# Altium PCB PCB1.PcbDoc
Units mm, origin at the board's own origin, x right, y up, seen from the top; angles counter-clockwise.
Board outline 91.43 x 88.01 mm, 2 copper layers (Top Layer, Bottom Layer); 43 components, 45 nets, 208 pads, 92 vias.
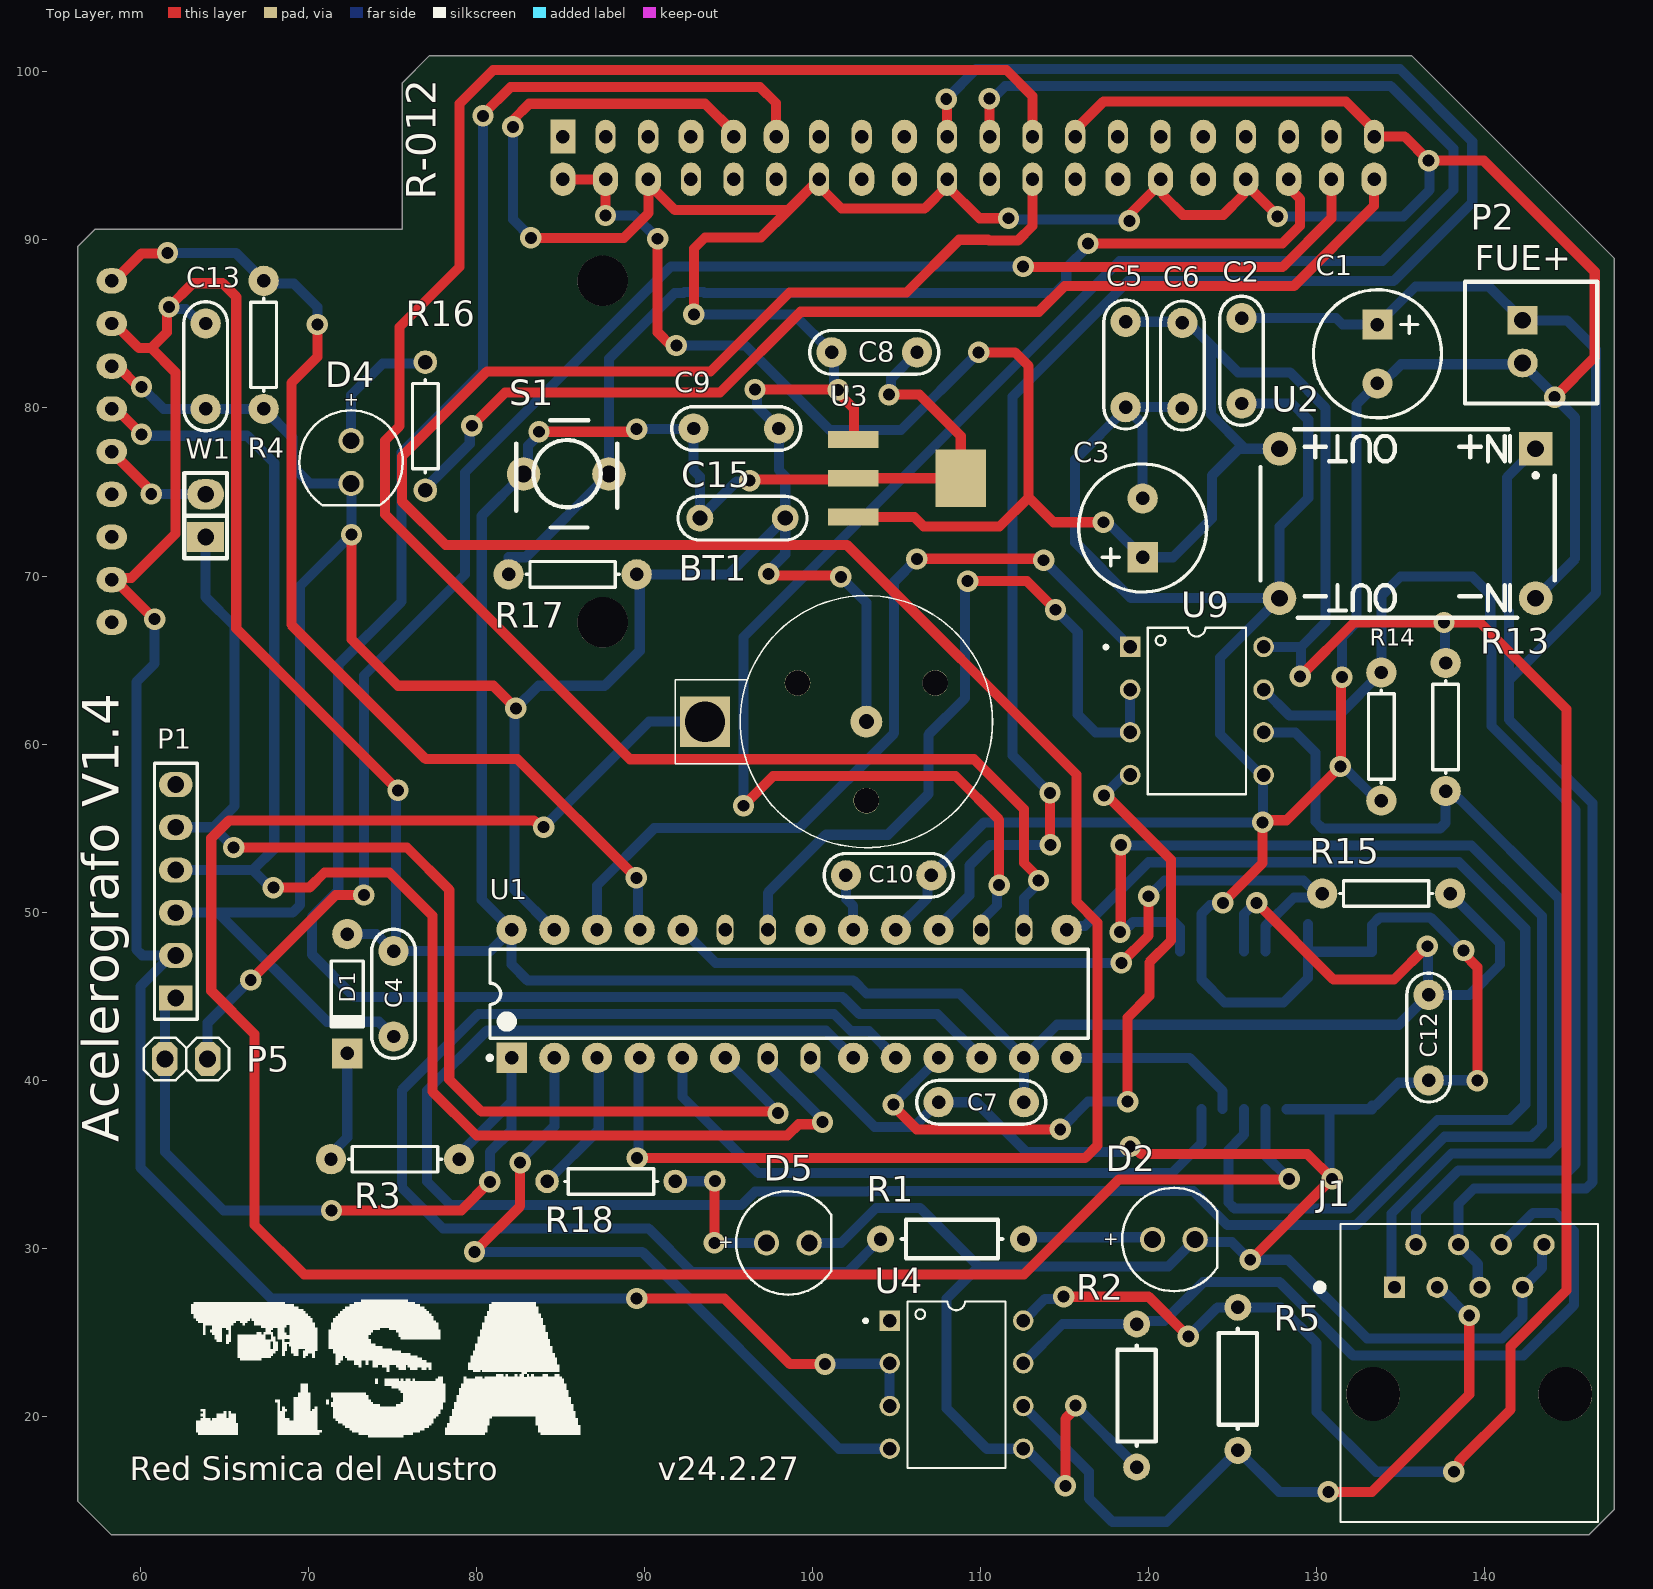
[diagram p0: Top Layer view]
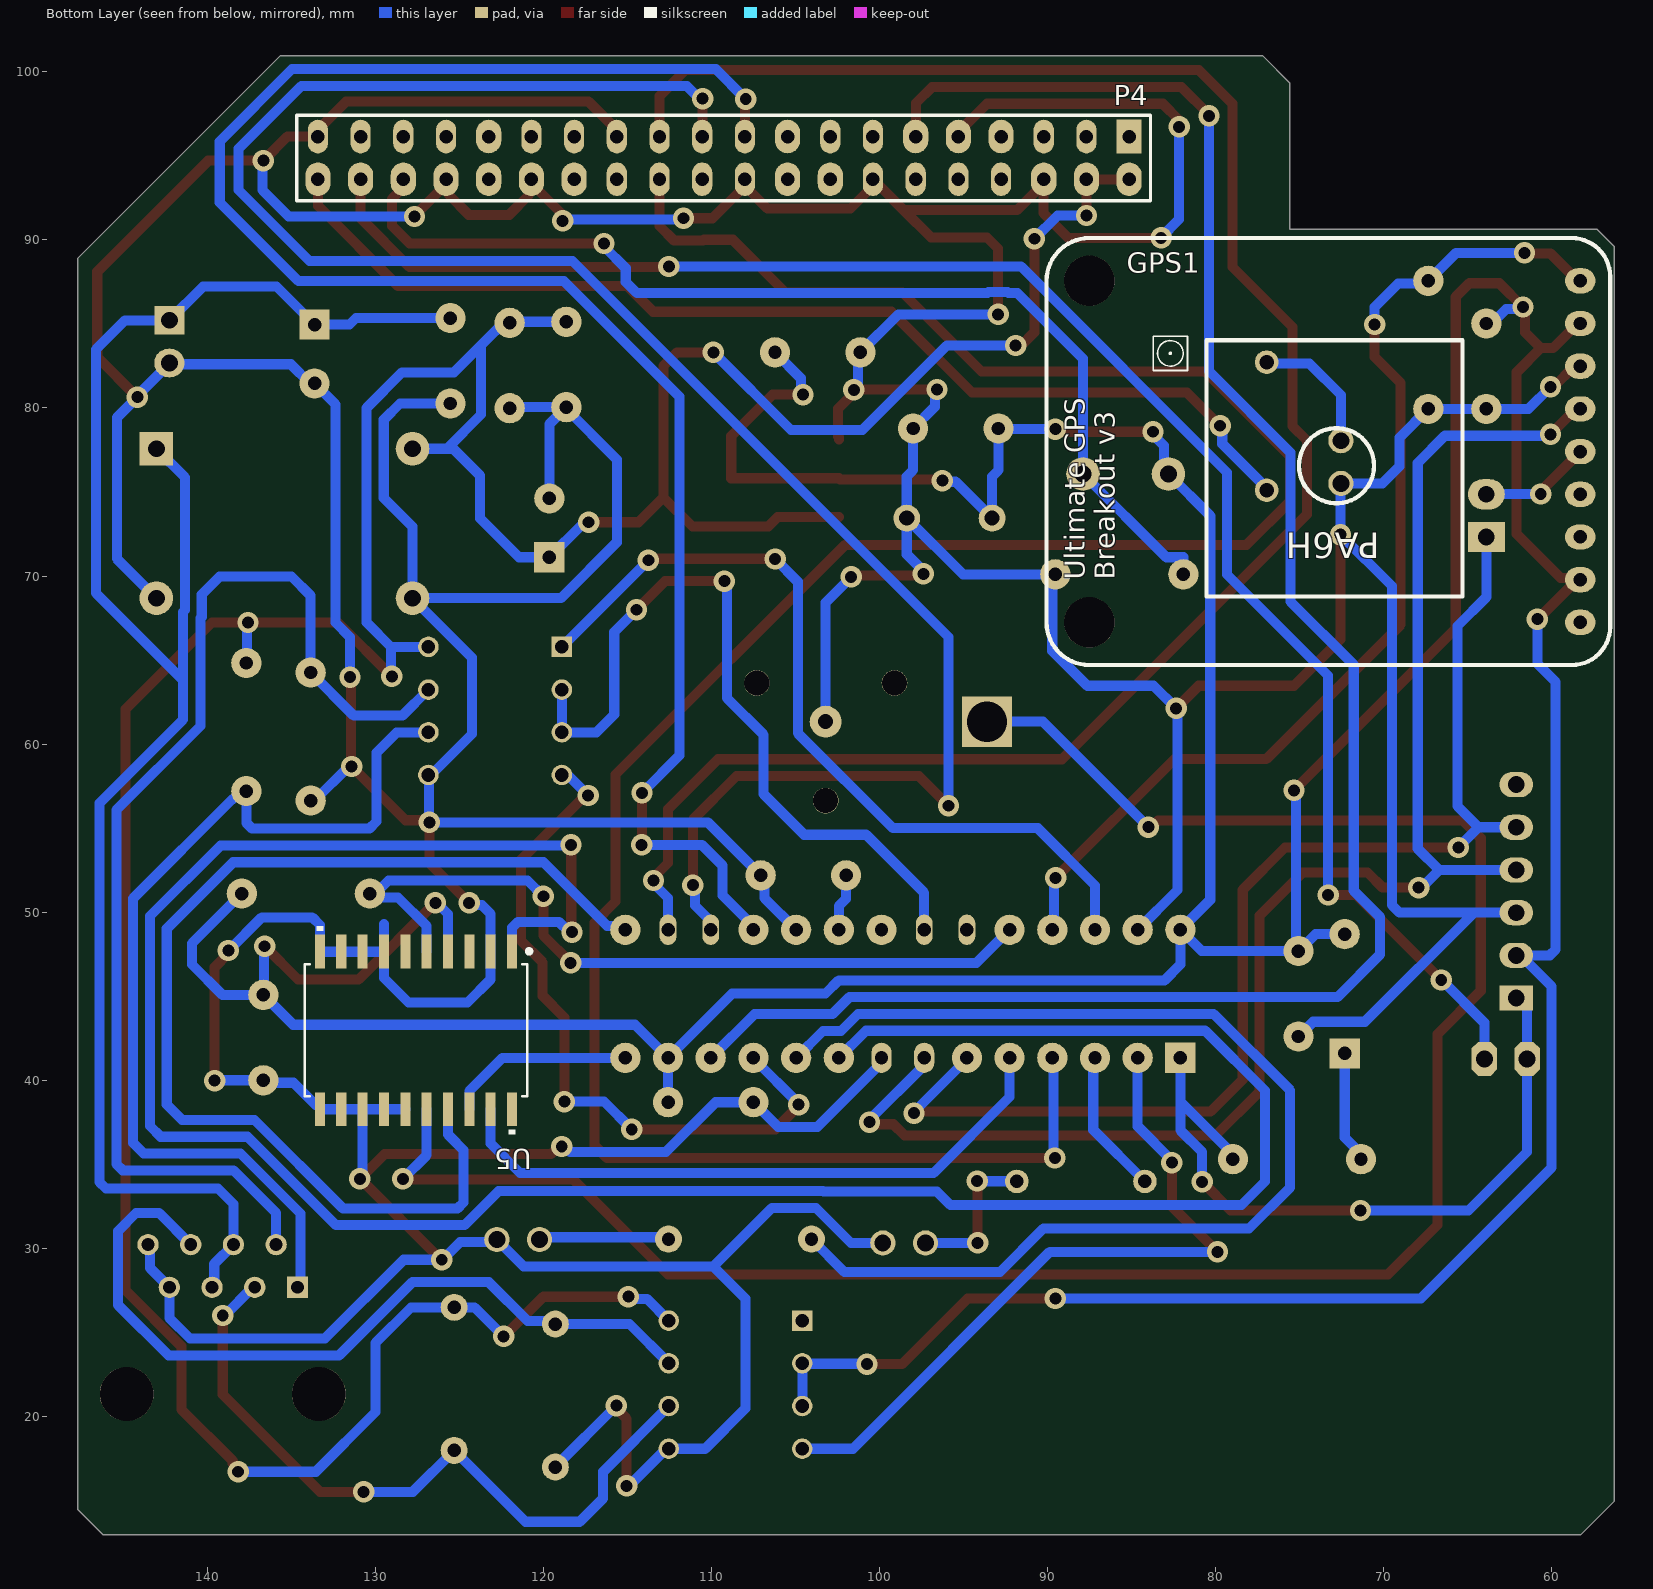
[diagram p1: Bottom Layer view, seen from below]

## Layer stack, top to bottom
Top Solder: solder mask 0.0102, Solder Resist, Dk 3.5
Top Layer: signal copper 0.0356
Dielectric 1: dielectric 0.32, FR-4, Dk 4.8
Bottom Layer: signal copper 0.0356
Bottom Solder: solder mask 0.0102, Solder Resist, Dk 3.5

## Board outline
56.272,14.975 58.293,12.954 146.177,12.954 147.701,14.478 147.701,88.9 135.636,100.965 77.216,100.965 75.572,99.321 75.572,90.629 57.312,90.629 56.272,89.589

## Design rules (kind name [scope] priority, off if disabled: settings)
Clearance [All] p1: gap=0.4 ignorepadtopadclearanceinfootprint=FALSE except(0.7: Arc-Poly Track-Poly SMDPad-Poly THPad-Poly Via-Poly Fill-Poly Poly-Poly Poly-Region Poly-Text)
PolygonConnect [All] p1: connectstyle=Relief reliefconductorwidth=0.254 reliefentries=4 polygonreliefangle="90 Angle" airgapwidth=0.254
RoutingVias [All] p1: holewidth=0.711 width=1.27 viastyle="Through Hole" minholewidth=0.711 minwidth=1.27 maxholewidth=0.711 maxwidth=1.27
SolderMaskExpansion [All] p1: expansion=0.102 istentingtop=FALSE
Width [All] p1: maxlimit=1.5 minlimit=0.2 preferedwidth=0.6 minimp=50.000000 maximp=50.000000 favimp=50.000000
30 further rules are at their usual default settings.

## Components (designator, comment, footprint, x,y, rotation, side; value= is the part's Value field where it differs from the comment)
BT1 "Bateria" Bateria-DS1307 93.599,61.341 r0 top
C1 "Cap" C100UFB 133.604,84.963 r270 top value=470uF
C2 "Cap" RAD0.2#1 125.519,85.348 r270 top value=100nF
C3 "Cap" C100UFB 119.634,71.12 r90 top value=220uF
C4 "Cap" RAD0.2#1 75.068,47.689 r270 top value=100nF
C5 "Cap" RAD0.2#1 118.625,85.129 r270 top value=100nF
C6 "Cap" RAD0.2#1 121.996,85.065 r270 top value=10nF
C7 "Cap" RAD0.2#1 112.574,38.697 r180 top value=100nF
C8 "Cap" RAD0.2#1 106.211,83.311 r180 top value=100nF
C9 "Cap" RAD0.2#1 92.916,78.778 r0 top value=10nF
C10 "Cap" RAD0.2#1 101.981,52.197 r0 top value=1uF
C12 "Cap" RAD0.2#1 136.652,45.085 r270 top value=100nF
C13 "Cap" RAD0.2#1 63.892,85.027 r270 top value=100nF
C15 "Cap" RAD0.2#2 93.29,73.444 r0 top value=100nF
D1 "1N914" DO-35 72.315,45.149 r270 top
D2 "LED3" Led_Green 121.488,30.531 r0 top
D4 "LED3" Led_Green 72.542,76.784 r270 top
D5 "LED3" Led_Green 98.526,30.327 r0 top
GPS1 "GPS_BREAKOUT_V3" GPS_BREAKOUT_V3 58.304,87.567 r0 bottom
J1 "54602-908LF" *AMPHENOL_54602-908LF 139.065,21.336 r0 top
P1 "Grabador" HDR1X6 62.114,44.895 r90 top
P2 "Entrada fuente externa" MOLEX-2 142.24,85.217 r270 top
P4 "Header 20X2" HDR2X20 85.142,96.149 r0 bottom
P5 "Header 2" "Header 1X2" 61.468,41.275 r0 top
R1 "Res1" "AXIAL-0.3 RES-1/4W" 104.038,30.556 r0 top value=1K
R2 "Res1" "AXIAL-0.3 RES-1/4W" 119.278,25.502 r270 top value=3K3
R3 "Res1" AXIAL-0.3#1 75.159,35.306 r180 top value=4K7
R4 "Res1" AXIAL-0.3#1 67.346,83.757 r270 top value=100K
R5 "Res1" "AXIAL-0.3 RES-1/4W" 125.298,17.983 r90 top value=3K3
R13 "Res1" AXIAL-0.3#1 137.661,61.02 r90 top value=3K3
R14 "Res1" AXIAL-0.3#1 133.833,60.452 r270 top value=3K3
R15 "Res1" AXIAL-0.3#1 134.123,51.113 r0 top value=10K
R16 "Res1" AXIAL-0.3#2 76.962,78.918 r90 top value=1K
R17 "Res1" AXIAL-0.3#1 85.725,70.104 r0 top value=10K
R18 "Res1" AXIAL-0.3#3 88.011,33.985 r0 top value=1K
S1 "SW-PB" PULSA4 85.344,76.073 r0 top
U1 "DSPIC33EP256MC202-I/SP" MCHP-SPDIP-SP28 98.604,45.149 r90 top
U2 "STEP_DOWN_CONVERTER" STEP_DOWN_CONVERTER 144.145,78.74 r180 top
U3 "LD33V" SOT-223 102.414,78.118 r270 top
U4 "MAX485" DIP794W47P254L991H457Q8 108.56,21.895 r0 top
U5 "DS3234S#" 21-0042B_20 127.57,42.977 r270 bottom value=Value
U9 "MAX485" DIP794W47P254L991H457Q8 122.86,61.976 r0 top
W1 "Jumper" SIP-2 63.892,72.327 r90 top

## Footprints (in the part's own frame and the unit in brackets; to place one, negate y for a bottom-side part, rotate by r counter-clockwise, add the part's x,y. Pads: shape width x height; smd on the part's side, far side on the other; paste and mask are expansions set on the pad)
21-0042B_20 [mm]
  rect 2x0.6 smd paste+0 mask+0: 1(-4.686,5.715) 2(-4.686,4.445) 3(-4.686,3.175) 4(-4.686,1.905) 5(-4.686,0.635) 6(-4.686,-0.635) 7(-4.686,-1.905) 8(-4.686,-3.175) 9(-4.686,-4.445) 10(-4.686,-5.715) 11(4.686,-5.715) 12(4.686,-4.445) 13(4.686,-3.175) 14(4.686,-1.905) 15(4.686,-0.635) 16(4.686,0.635) 17(4.686,1.905) 18(4.686,3.175) 19(4.686,4.445) 20(4.686,5.715)
  silkscreen extent -6.18,-6.63 6.18,6.86, body extent -5.32,-6.5 5.32,6.5, height 2.64
*AMPHENOL_54602-908LF [mm]
  rect 1.268x1.268 hole 0.76: 1(-4.445,6.35)
  round 1.268 hole 0.76: 2(-3.175,8.89) 3(-1.905,6.35) 4(-0.635,8.89) 5(0.635,6.35) 6(1.905,8.89) 7(3.175,6.35) 8(4.445,8.89)
  round 3.2 hole 3.2 unplated: None(-5.715,0) None(5.715,0)
  silkscreen extent -9.09,-7.62 7.65,10.12, body extent -7.65,-7.58 7.65,10.16, height 12.7
AXIAL-0.3#1 [mm] "Axial Device, Thru-Hole; 2 Leads; 0.3 in Pin Spacing"
  round 1.8 hole 0.8: 1(-3.81,0) 2(3.81,0)
  silkscreen extent -2.77,-0.76 2.77,0.76
AXIAL-0.3#2 [mm] "Axial Device, Thru-Hole; 2 Leads; 0.3 in Pin Spacing"
  round 1.4 hole 0.85: 1(-3.81,0) 2(3.81,0)
  silkscreen extent -2.77,-0.76 2.77,0.76
AXIAL-0.3#3 [mm] "Axial Device, Thru-Hole; 2 Leads; 0.3 in Pin Spacing"
  round 1.4 hole 0.8: 1(-3.81,0) 2(3.81,0)
  silkscreen extent -2.77,-0.76 2.77,0.76
"AXIAL-0.3 RES-1/4W" [mm] "AXIAL"
  round 1.6 hole 0.8: 1(0,0) 2(8.509,0)
  silkscreen extent 1.27,-1.14 7.24,1.14
Bateria-DS1307 [mm]
  rect 3x3 hole 2.4: 0(0,0)
  round 1.9 hole 0.9: 1(9.6,0)
  round 1.524 hole 1.5: 2(5.5,2.3) 3(13.7,2.3) 4(9.6,-4.7)
  silkscreen extent -1.78,-7.5 17.1,7.5, body extent -1.8,-7.43 17.24,7.63, height 4.31
C100UFB [mm]
  rect 1.8x1.8 hole 0.8: 1(0,0)
  round 1.8 hole 0.8: 2(3.5,0)
  silkscreen extent -2.07,-3.81 5.55,3.81
DIP794W47P254L991H457Q8 [mm]
  rect 1.22x1.22 hole 0.81: 1(-3.97,3.81)
  round 1.22 hole 0.81: 2(-3.97,1.27) 3(-3.97,-1.27) 4(-3.97,-3.81) 5(3.97,-3.81) 6(3.97,-1.27) 7(3.97,1.27) 8(3.97,3.81)
  silkscreen extent -5.51,-4.95 2.92,4.95, body extent -5.08,-4.69 5.08,4.69, height 4.67
DO-35 [mm] "Diode, Axial; Body 3.8 x 1.9 mm (LxDia. max), Lead Dia. 0.53 mm (max)"
  round 1.8 hole 0.8: 1(-3.55,0)
  rect 1.8x1.8 hole 0.8: 2(3.55,0)
  silkscreen extent -1.95,-0.95 2.05,0.95
GPS_BREAKOUT_V3 [mm]
  oval 1.8x1.5 hole 0.8: 0(0,0) 1(0,2.54) 2(0,5.08) 3(0,7.62) 4(0,10.16) 5(0,12.7) 6(0,15.24) 7(0,17.78) 8(0,20.32)
  round 3 hole 3: ""(29.21,0) ""(29.21,20.32)
  silkscreen extent -1.78,-2.54 31.75,22.86
HDR1X6 [mm] "Connector; Header; 6 Position"
  rect 1.5x2 hole 1: 1(0,0)
  oval 1.5x2 hole 1: 2(2.54,0) 3(5.08,0) 4(7.62,0) 5(10.16,0) 6(12.7,0)
  silkscreen extent -1.27,-1.27 13.97,1.27
HDR2X20 [mm] "Connector; Header; 20x2 Position"
  rect 1.5x2 hole 0.8: 1(0,0)
  oval 1.5x2 hole 0.8: 2(0,2.54) 4(2.54,2.54) 6(5.08,2.54) 7(7.62,0) 9(10.16,0) 11(12.7,0) 16(17.78,2.54) 17(20.32,0) 18(20.32,2.54) 28(33.02,2.54) 30(35.56,2.54) 31(38.1,0) 32(38.1,2.54) 34(40.64,2.54) 36(43.18,2.54) 38(45.72,2.54) 40(48.26,2.54)
  oval 1.2x2 hole 0.8: 3(2.54,0) 5(5.08,0) 8(7.62,2.54) 10(10.16,2.54) 12(12.7,2.54) 13(15.24,0) 14(15.24,2.54) 15(17.78,0) 19(22.86,0) 20(22.86,2.54) 21(25.4,0) 22(25.4,2.54) 23(27.94,0) 24(27.94,2.54) 25(30.48,0) 26(30.48,2.54) 27(33.02,0) 29(35.56,0) 33(40.64,0) 35(43.18,0) 37(45.72,0) 39(48.26,0)
  silkscreen extent -1.27,-1.27 49.53,3.81
"Header 1X2" [mil] "Conector Header 1 linea 2 terminales"
  oct 60x80 hole 39.37: 1(0,0) 2(100,0)
  silkscreen extent -50,-50 150,50, body extent -50,-49 150,49, height 341
Led_Green [mm] "THT Mono-color Round Color LED, 2-leads"
  round 1.5 hole 1: 1(-1.27,0) 2(1.27,0)
  silkscreen extent -3.07,-3.07 2.58,3.08, body extent -2.95,-2.95 2.45,2.95, height 9.2
MCHP-SPDIP-SP28 [mm] "DIP, 28-Leads, Body 34.86x6.79mm, Pitch 2.54mm"
  rect 1.8x1.8 hole 0.8: 1(-3.81,16.51)
  round 1.8 hole 0.8: 2(-3.81,13.97) 3(-3.81,11.43) 4(-3.81,8.89) 5(-3.81,6.35) 6(-3.81,3.81) 9(-3.81,-3.81) 10(-3.81,-6.35) 11(-3.81,-8.89) 12(-3.81,-11.43) 13(-3.81,-13.97) 14(-3.81,-16.51) 15(3.81,-16.51) 18(3.81,-8.89) 19(3.81,-6.35) 20(3.81,-3.81) 21(3.81,-1.27) 24(3.81,6.35) 25(3.81,8.89) 26(3.81,11.43) 27(3.81,13.97) 28(3.81,16.51)
  oval 1.8x1.2 hole 0.8: 7(-3.81,1.27) 8(-3.81,-1.27)
  oval 1.8x1 hole 0.8: 16(3.81,-13.97) 17(3.81,-11.43) 22(3.81,1.27) 23(3.81,3.81)
  silkscreen extent -3.93,-17.8 2.65,17.93, body extent -3.95,-17.77 3.95,17.77, height 5.08
MOLEX-2 [mm]
  rect 1.7x1.8 hole 1: 1(0,0)
  oval 1.7x1.8 hole 1: 2(2.54,0)
  silkscreen extent -2.29,-3.43 4.95,4.45, body extent -2.31,-3.5 4.9,4.4, height 10.4
PULSA4 [mm]
  round 2 hole 1: 1(-2.54,0) 2(2.54,0)
  silkscreen extent -2.97,-3.18 3.03,3.19
RAD0.2#1 [mm]
  round 1.8 hole 0.8: 1(0,0) 2(5.08,0)
  silkscreen extent -1.3,-1.3 6.38,1.3
RAD0.2#2 [mm]
  round 1.6 hole 0.9: 1(0,0) 2(5.08,0)
  silkscreen extent -1.3,-1.3 6.38,1.3
SIP-2 [mm]
  rect 1.8x2.2 hole 1: 1(0,0)
  oval 1.8x2.2 hole 1: 2(2.54,0)
  silkscreen extent -1.27,-1.27 3.81,1.27
SOT-223 [mm]
  rect 1x3 smd: 1(4.6,0) 2(0,0) 3(2.3,0)
  rect 3.4x3 smd: 3(2.3,6.4)
  body extent -1.2,1.41 5.8,5, height 1.1
STEP_DOWN_CONVERTER [mm]
  rect 2x2 hole 1: 1(1.13,1.165)
  round 2 hole 1: 2(1.13,10.055) 3(16.37,1.165) 4(16.37,10.055)
  silkscreen extent 0,0 17.5,11.22, body extent -0.14,-0.1 17.64,11.33, height 6.63

## Part data
BT1: library part BateriaDS1307
C1 C2 C3 C4 C5 C6 C7 C8 C9 C10 C12 C13 C15: "Capacitor", LatestRevisionDate=17-Jul-2002, LatestRevisionNote="Re-released for DXP Platform.", PackageDescription="Radial Cap, Thru-Hole; 2 Leads; 0.3 in Pin Spacing", PackageReference=RAD-0.3, Published=8-Jun-2000, Publisher="Altium Limited"
D1: library part "Diode 1N914", "High Conductance Fast Diode", Code_JEDEC=DO-204-AH, ComponentLink1Description="Manufacturer Link", ComponentLink1URL=http://www.fairchildsemi.com/, ComponentLink2Description=Datasheet, ComponentLink2URL=http://www.fairchildsemi.com/ds/1N%2F1N4448.pdf, DatasheetVersion=1997, LatestRevisionDate=17-Jul-2002, LatestRevisionNote="Re-released for DXP Platform.", PackageDescription="Diode, Axial; Body 3.8 x 1.9 mm (LxDia. max), Lead Dia. 0.53 mm (max)", PackageReference=DO-35, Published=8-Jun-2000, Publisher="Altium Limited"
D2 D4 D5: "Typical BLUE SiC LED", DatasheetVersion=16-Apr-2002, LatestRevisionDate=17-Dec-2003, LatestRevisionNote="PCB Footprint replaced.", PackageDescription="SM LED; 2 C-Bend Leads; Body 3.5 x 2.8 x 1.9 mm, inc leads (LxWxH typ)", PackageReference=3.5X2.8X1.9, PackageVersion=16-Apr-2002, Published=8-Jun-2000, Publisher="Altium Limited"
J1: "Jack Modular Connector 8p8c _RJ45, Ethernet_ 90Â° Angle _Right_ Unshielded Cat3", Package=None, Digi-Key_Part_Number=609-1046-ND, Digi-Key_Purchase_URL=https://www.digikey.com/product-detail/en/amphenol-icc-fci/54602-908LF/609-1046-ND/1001360?utm_source=snapeda&utm_medium=aggregator&utm_campaign=symbol, MF="Amphenol ICC", MP=54602-908LF, SnapEDA_Link=https://www.snapeda.com/parts/54602-908LF/Amphenol%20FCI/view-part/1356963/?ref=snap
P1: library part "Header 6", "Header, 6-Pin", LatestRevisionDate=17-Jul-2002, LatestRevisionNote="Re-released for DXP Platform.", Publisher="Altium Limited"
P2: library part "Header 2", "Header, 2-Pin", LatestRevisionDate=17-Jul-2002, LatestRevisionNote="Re-released for DXP Platform.", Publisher="Altium Limited"
P4: "Header, 20-Pin, Dual row", LatestRevisionDate=17-Jul-2002, LatestRevisionNote="Re-released for DXP Platform.", Publisher="Altium Limited"
P5: "Header, 2-Pin", LatestRevisionDate=17-Jul-2002, LatestRevisionNote="Re-released for DXP Platform.", Publisher="Altium Limited"
R1 R2 R3 R4 R5 R13 R14 R15 R16 R17 R18: "Resistor", LatestRevisionDate=17-Jul-2002, LatestRevisionNote="Re-released for DXP Platform.", PackageDescription="Axial Device, Thru-Hole; 2 Leads; 0.3 in Pin Spacing", PackageReference=AXIAL-0.3, Published=8-Jun-2000, Publisher="Altium Limited"
S1: "Switch", LatestRevisionDate=17-Jul-2002, LatestRevisionNote="Re-released for DXP Platform.", PackageDescription="Switch; 2 Leads", PackageReference=SPST-2, Published=24-Mar-1999, Publisher="Altium Limited"
U1: "16-Bit Microcontroller and Digital Signal Controller with High-Speed PWM, Op Amps and Advanced Analog, 70 MIPS, 21 I/O, GPIO, -40 to 85 degC, 28-pin SPDIP (SP28), Tube", Manufacturer=Microchip, Supplier Part Number 1=DSPIC33EP256MC202-I/SP-ND, ComponentLink1Description="Manufacturer URL", ComponentLink1URL=http://www.microchip.com, ComponentLink2Description=Datasheet, ComponentLink2URL=http://ww1.microchip.com/downloads/en/DeviceDoc/70657F.pdf, ComponentLink3Description="Package Specification", ComponentLink3URL=http://www.microchip.com/stellent/groups/techpub_sg/documents/packagingspec/en012702.pdf, ComponentLink4Description="Product URL", ComponentLink4URL=http://www.microchip.com/dsPIC33EP256MC202, DatasheetVersion="Rev. F", Mounting Technology="Through Hole", PackageDescription="28-Lead Plastic Dual In-Line, 34.86 x 6.79 mm Body, 2.54 mm Pitch", PackageReference=SPDIP-SP28, PackageVersion=C04-070B, PartNumber=DSPIC33EP256MC202-I/SP, Supplier 1=Digi-Key, Supplier 2=Farnell, Supplier 3=Newark, Supplier 4=Mouser, Supplier Part Number 2=2212194, Supplier Part Number 3=66T8001, Supplier Part Number 4=579-PC33256MC202ISP
U3: "High-Performance 16-bit Digital Signal Controller, 24 KB Flash, 2 KB SRAM, 1 KB EEPROM, 40-Pin PDIP, Industrial Temperature"
U5: "No Description Available", Built_By=EMA_UL_Team, Copyright="Copyright (C) 2018 Accelerated Designs. All rights reserved", Manufacturer_Part_Number=DS3234S#, RefDes=RefDes, Type=DEV, Vendor="Maxim Integrated Products"
W1: "Jumper Wire", LatestRevisionDate=17-Jul-2002, LatestRevisionNote="Re-released for DXP Platform.", PackageDescription="Radial Cap, Thru-Hole; 2 Leads; 0.2 in Pin Spacing", PackageReference=RAD-0.2, Published=24-Mar-1999, Publisher="Altium Limited"

## Via types
v1: diameter 1.27, hole 0.711, Top Layer to Bottom Layer, 92 vias

## Nets (pads, with @x,y where several pads share a name; then routed paths per layer and width w, separated by ;. In a path a pad name is that pad's centre, name@x,y a point inside that pad or via, vN(x,y) a via of type N, cw(c..) or ccw(c..) an arc to the next point about the centre after c; other vN are vias at no path point)
5V: C3.1 C5.1 C6.1 P4.2 P4.4 R5.2 R13.2 U2.3 U3.1 U4.8 U9.8 | length 224.5
  Top Layer w0.6: P4.2 85.142,93.599 P4.4@87.681,93.599 ; v1(87.681,91.454) P4.4@87.681,93.599 ; P4.4 P4.4@87.681,93.599 ; v1(90.78,90.068) 90.78,84.506 91.567,83.718 v1(91.897,83.718) ; U3.1 106.045,73.518 106.614,72.949 111.125,72.949 112.852,74.676 ; v1(109.88,83.312) 112.039,83.312 112.852,82.499 112.852,74.676 ; v1(114.935,27.127) 119.99,27.127 v1(122.352,24.765) ; v1(117.297,73.203) 114.325,73.203 112.852,74.676 ; v1(129.007,64.033) 132.207,67.234 v1(137.566,67.234) 139.7,67.234 144.844,62.09 144.844,27.496 141.529,24.181 141.529,20.422 138.471,17.364 138.471,17.215 138.151,16.895 v1(138.151,16.713)
  Bottom Layer w0.6: v1(87.681,91.454) 89.394,91.454 v1(90.78,90.068) ; v1(91.897,83.718) 95.987,83.718 101.016,78.689 105.258,78.689 v1(109.88,83.312) ; U4.8 113.824,26.999 114.807,26.999 v1(114.935,27.127) ; v1(117.297,73.203) 117.425,73.075 117.679,73.075 C3.1 121.437,71.12 123.749,73.431 123.749,75.971 125.352,77.575 125.73,77.575 ; C5.1 C6.1@121.996,85.129 ; C6.1@122.087,85.336 123.698,83.725 ; v1(122.352,24.765) 124.079,26.492 127.864,26.492 129.972,24.384 129.972,20.269 133.528,16.713 v1(138.151,16.713) ; U9.8 129.057,65.786 ; U2.3 125.73,77.575 ; v1(129.007,64.033) 129.057,64.084 129.057,65.786 ; v1(137.566,67.234) 137.614,67.186 137.614,64.877 R13.2 ; 123.698,83.725 125.304,82.118 128.397,82.118 130.505,80.01 130.505,67.234 129.057,65.786 ; 123.698,83.725 123.698,79.607 125.73,77.575
_DSPIC_RX: P1.5 U1.6 W1.1 | length 72.6
  Top Layer w0.6: v1(65.557,53.85) 75.868,53.85 78.384,51.333 78.384,40.056 80.289,38.151 97.841,38.151 v1(97.942,38.049)
  Bottom Layer w0.6: P1.5 64.351,55.055 ; W1.1 63.892,68.747 65.608,67.031 65.608,56.312 64.351,55.055 ; v1(65.557,53.85) 64.351,55.055 ; U1.6 94.794,41.268 97.942,38.12 v1(97.942,38.049)
A: J1.1 R13.1 U9.6 | length 57.7
  Bottom Layer w0.6: U9.6 126.839,60.697 128.711,60.697 129.921,59.487 129.921,55.397 130.343,54.975 137.31,54.975 137.661,55.326 R13.1 137.986,57.21 138.482,56.714 138.511,56.714 144.395,50.83 144.395,36.272 143.768,35.646 138.009,35.646 134.442,32.079 134.442,27.864 J1.1
B: J1.2 R14.1 U9.7 | length 69.3
  Bottom Layer w0.6: U9.7 128.379,61.697 131.267,61.697 R14.1 133.833,68.834 134.976,69.977 139.243,69.977 140.315,68.905 140.315,67.567 140.386,67.496 140.386,61.087 145.395,56.078 145.395,35.027 145.013,34.646 138.423,34.646 135.89,32.113 J1.2
D/C: P4.29
DS3231_SQW: R15.1 U1.24 U5.5 | length 48
  Top Layer w0.6: v1(118.364,46.99) 119.99,48.616 v1(119.99,50.952)
  Bottom Layer w0.6: U1.24 94.223,46.99 v1(118.364,46.99) ; v1(119.99,50.952) 120.929,51.892 129.209,51.892 R15.1@129.988,51.113 ; U5.5 126.935,49.183 128.635,50.884 130.083,50.884 R15.1
DSPIC_RX: GPS1.4 W1.2 | length 6.7
  Top Layer w0.6: GPS1.4 58.304,77.394 60.655,75.042 v1(60.655,74.879)
  Bottom Layer w0.6: v1(60.655,74.879) 60.661,74.873 63.886,74.873 W1.2
DSPIC_RX_1: U1.26 U9.1 | length 49.9
  Top Layer w0.6: v1(106.197,71.018) 106.212,71.033 113.651,71.033 v1(113.741,70.942)
  Bottom Layer w0.6: U1.26 87.174,51.597 90.579,55.002 99.194,55.002 104.849,60.658 104.849,69.67 v1(106.197,71.018) ; v1(113.741,70.942) 113.741,70.935 U9.1
DSPIC_TX: GPS1.3 P1.4 U1.7 | length 93.1
  Top Layer w0.6: GPS1.3 58.559,79.947 v1(60.071,78.435) ; v1(67.92,51.46) 70.053,51.46 70.956,52.364 74.814,52.364 77.384,49.793 77.384,39.329 79.999,36.714 98.495,36.714 99.169,37.388 100.456,37.388 v1(100.584,37.516)
  Bottom Layer w0.6: v1(60.071,78.435) 60.159,78.347 66.357,78.347 67.97,76.733 67.97,53.785 66.7,52.515 ; P1.4 66.7,52.515 ; v1(67.92,51.46) 67.755,51.46 66.7,52.515 ; U1.7 97.334,40.902 100.584,37.652 v1(100.584,37.516)
DSPIC_TX_1: U1.11 U9.4 | length 42.3
  Top Layer w0.6: v1(104.8,38.557) 104.8,38.481 106.197,37.084 v1(114.732,37.084) ; v1(117.323,56.947) 117.504,56.947 121.325,53.126 121.325,48.311 120.035,47.021 120.035,45.029 118.745,43.739 v1(118.745,38.735)
  Bottom Layer w0.6: v1(104.8,38.557) 104.8,38.601 107.494,41.295 U1.11 ; v1(114.732,37.084) 116.383,38.735 v1(118.745,38.735) ; v1(117.323,56.947) 118.542,58.166 U9.4
FUENTE_12V: C1.1 C2.1 J1.4 J1.5 P2.1 U2.1 | length 106
  Bottom Layer w0.6: C2.1 131.14,85.348 131.525,84.963 C1.1 135.865,87.224 140.233,87.224 P2.1 144.882,85.217 146.609,83.49 146.609,68.986 141.427,63.805 ; J1.5 139.572,27.814 139.572,29.084 J1.4 138.43,32.639 139.354,33.563 146.013,33.563 146.395,33.945 146.395,56.492 141.427,61.46 141.427,63.805 ; U2.1 141.315,75.875 141.315,67.981 141.427,67.869 141.427,63.805
GND: BT1.1 C1.2 C2.2 C3.2 C4.2 C5.2 C6.2 C7.2 C8.2 C9.2 C10.2 C12.2 C13.2 C15.2 D2.2 D4.2 D5.2 GPS1.2 J1.7 J1.8 P1.3 P2.2 P4.6 P4.9 P4.14 P4.20 P4.25 P4.30 P4.34 P4.39 R2.2 R4.2 R14.2 R17.2 U1.8 U1.19 U1.27 U2.2 U2.4 U3.2 U4.5 U5.2 U5.7 U5.8 U5.9 U5.10 U5.11 U5.12 U5.13 U5.14 U5.15 U9.5 | length 639
  Top Layer w0.6: GPS1.2 58.657,82.487 59.89,81.255 v1(60.071,81.255) ; v1(72.568,72.466) 72.568,66.243 75.336,63.475 81.001,63.475 v1(82.347,62.128) ; v1(82.169,96.723) 82.169,97.136 83.134,98.101 93.599,98.101 95.302,96.399 P4.9 ; v1(83.236,90.119) 88.765,90.119 90.234,91.588 90.234,93.347 91.81,91.77 98.543,91.77 ; v1(92.939,85.573) 92.939,89.488 93.595,90.145 96.917,90.145 98.543,91.77 ; v1(96.571,81.102) 96.584,81.09 101.511,81.09 v1(101.524,81.077) 101.524,80.895 102.464,79.956 102.464,78.318 102.414,78.268 U3.2 ; v1(97.384,70.129) 97.472,70.04 101.587,70.04 v1(101.676,69.952) ; P4.14@100.182,93.409 98.543,91.77 ; P4.14 100.382,93.209 101.719,91.872 106.665,91.872 P4.20@108.002,93.209 ; P4.20 P4.20@108.002,93.209 ; v1(111.658,91.288) 109.923,91.288 P4.20@108.002,93.209 ; v1(115.037,15.875) 115.037,19.859 115.646,20.469 v1(115.646,20.65) ; P4.25 115.622,96.549 117.295,98.222 131.729,98.222 133.402,96.549 P4.39 135.22,96.149 v1(136.652,94.717) 139.929,94.717 146.533,88.113 146.533,83.033 v1(144.145,80.645) ; v1(118.847,91.135) 118.975,91.263 118.975,91.632 120.702,93.359 P4.30 ; v1(118.897,36.068) 119.079,36.068 119.536,35.611 129.438,35.611 v1(130.912,34.138) 130.886,34.138 126.076,29.327 v1(126.036,29.327) ; P4.30@120.874,92.638 122.022,91.491 124.435,91.491 P4.34@125.61,92.666 ; v1(124.409,50.557) 126.771,52.919 v1(126.771,55.347) 126.9,55.475 128.195,55.475 v1(131.394,58.674) 131.445,58.725 131.445,63.932 v1(131.496,63.983) ; P4.34 125.782,93.313 127.66,91.435 v1(127.66,91.389) ; v1(138.735,47.727) 138.735,47.545 139.548,46.732 v1(139.548,39.98)
  Bottom Layer w0.6: v1(60.071,81.255) 61.379,79.947 C13.2 R4.2 69.063,78.23 69.063,76.53 70.079,75.514 D4.2 72.555,75.501 72.555,72.479 v1(72.568,72.466) 69.509,69.407 69.509,50.425 69.059,49.975 64.63,49.975 ; P1.3 64.63,49.975 ; C4.2 74.192,43.485 71.12,43.485 64.63,49.975 ; v1(82.169,96.723) 82.169,91.223 83.236,90.156 v1(83.236,90.119) ; U1.27@84.634,48.906 U1.27 82.271,51.322 82.271,62.052 v1(82.347,62.128) 83.693,63.475 87.63,63.475 89.714,65.558 89.714,69.925 R17.2 95.03,70.104 C15.2 ; v1(92.939,85.573) 98.869,85.573 C8.2 101.271,83.17 101.271,81.511 101.524,81.258 v1(101.524,81.077) ; v1(96.571,81.102) 96.699,80.974 96.699,80.075 C9.2 97.996,76.299 98.37,75.925 C15.2 ; v1(97.384,70.129) 97.384,70.311 98.37,71.297 C15.2 ; D5.2 101.688,30.328 103.771,32.41 106.401,32.41 109.88,28.931 ; U1.8 99.874,41.039 103.69,37.222 106.019,37.222 C7.2 109.741,38.697 112.689,35.749 118.397,35.749 118.716,36.068 v1(118.897,36.068) ; v1(101.676,69.952) 103.199,68.429 BT1.1 ; U1.19 106.831,50.837 106.831,51.967 C10.2 110.211,55.347 v1(126.771,55.347) 126.801,55.376 126.801,58.137 U9.5 126.67,58.166 124.231,60.604 124.231,65.141 U2.4 ; v1(111.658,91.288) 111.735,91.211 118.77,91.211 v1(118.847,91.135) ; v1(115.037,15.875) 114.888,15.875 112.678,18.085 110.363,18.085 107.975,20.472 107.975,27.026 109.88,28.931 ; v1(115.646,20.65) R2.2@119.278,17.018 ; C5.2 C6.2@121.996,80.049 ; C3.2 119.634,79.041 118.679,79.995 115.621,76.937 115.621,72.009 118.945,68.685 U2.4 ; v1(124.409,50.557) 124.281,50.429 123.657,50.429 123.125,49.896 123.125,46.014 124.511,44.628 128.016,44.628 129.475,46.086 U5.7@129.475,47.65 ; C2.2 128.52,80.268 129.489,79.299 129.489,74.651 127.787,72.949 127.787,68.697 U2.4 ; v1(127.66,91.389) 135.136,91.389 136.707,92.96 136.707,94.662 v1(136.652,94.717) ; U5.15 128.205,38.278 U5.14@129.475,38.278 ; U5.14 U5.14@129.475,38.278 ; 129.475,49.291 U5.7 U5.7@129.475,47.65 ; U5.13 U5.13@130.745,38.278 ; U5.8 U5.8@130.745,47.65 ; v1(130.912,34.138) 130.912,34.319 130.745,34.486 U5.13@130.745,38.278 ; v1(131.394,58.674) 131.576,58.674 133.608,56.642 R14.2 ; v1(131.496,63.983) 131.505,63.992 131.505,66.38 132.359,67.234 132.359,80.218 C1.2 133.874,81.463 135.012,82.601 142.164,82.601 P2.2 142.24,82.638 144.145,80.733 v1(144.145,80.645) 145.364,79.426 145.364,71.034 U2.2 ; U5.12 U5.12@132.015,38.278 ; U5.9 U5.9@132.015,47.65 ; v1(138.735,47.727) 138.709,47.727 136.74,49.696 133.744,49.696 133.285,49.236 133.285,47.65 U5.9@132.015,47.65 ; v1(139.548,39.98) 139.522,40.005 C12.2 136.505,39.858 134.852,39.858 133.485,38.491 133.285,38.491 U5.11 133.285,38.278 U5.12@132.015,38.278 ; J1.8 143.382,30.098 143.382,28.828 J1.7 142.24,25.863 141.015,24.638 132.994,24.638 128.305,29.327 v1(126.036,29.327) 125.995,29.327 124.937,30.385 122.904,30.385 D2.2 121.158,28.931 109.88,28.931 ; U5.14@129.475,38.278 U5.13@130.745,38.278 ; U5.7@129.475,47.65 U5.8@130.745,47.65 ; U5.13@130.745,38.278 U5.12@132.015,38.278 ; U5.8@130.745,47.65 U5.9@132.015,47.65
GPS_1PPS: GPS1.0 R4.1 U1.25 | length 63.9
  Top Layer w0.6: GPS1.0 58.454,87.567 60.085,89.199 61.589,89.199 v1(61.62,89.23) ; R4.1@67.333,87.554 R4.1 ; v1@70.354,84.963 v1(70.536,84.963) 70.536,83.033 68.986,81.483 68.986,67.107 76.987,59.106 82.448,59.106 v1(89.51,52.045)
  Bottom Layer w0.6: v1(61.62,89.23) 65.683,89.23 R4.1 67.519,87.394 69.146,87.394 70.536,86.004 v1(70.536,84.963) ; v1(89.51,52.045) 89.612,51.943 89.612,49.061 U1.25
INT_SINC_1: U1.2 U4.4 | length 43.1
  Top Layer w0.6: v1(79.883,29.794) 82.601,32.512 v1(82.601,35.103)
  Bottom Layer w0.6: v1(79.883,29.794) 89.859,29.794 101.569,18.085 U4.4 ; v1(82.601,35.103) 82.601,35.23 84.634,37.263 U1.2
INT_SINC_2: R1.1 U1.10 | length 69.5
  Bottom Layer w0.6: R1.1 102.083,28.6 95.707,28.6 92.827,28.6 90.246,31.181 78.014,31.181 75.565,33.63 75.565,39.405 80.112,43.951 101.273,43.951 102.286,42.939 103.354,42.939 U1.10
INT_SINC_3: U1.21
INT_SINC_4: U1.23
LED: P4.31
LED_DSPIC: R18.1 U1.3 | length 8.7
  Bottom Layer w0.6: R18.1 87.274,37.059 87.274,41.238 U1.3
LED_RPI: P4.40 R16.1 | length 65.7
  Top Layer w0.6: v1(79.731,78.943) 81.712,80.924 94.488,80.924 99.289,85.725 113.462,85.725 114.986,87.249 128.626,87.249 133.402,92.025 P4.40
  Bottom Layer w0.6: R16.1 76.962,75.227 79.602,77.867 79.602,78.815 v1(79.731,78.943)
MAX485_MS: U1.22 U9.2 U9.3 | length 46.6
  Top Layer w0.6: v1(109.22,69.698) 112.751,69.698 v1(114.452,67.996)
  Bottom Layer w0.6: U1.22 97.334,51.157 100.787,54.61 104.47,54.61 106.883,57.023 106.883,60.554 109.068,62.738 109.068,69.545 v1(109.22,69.698) ; v1(114.452,67.996) 115.773,66.675 115.773,61.769 116.836,60.706 U9.3 U9.2
MCLR: P1.1 P5.1 R3.1 U1.1 | length 43.9
  Top Layer w0.6: v1(71.374,32.258) 79.096,32.258 v1(80.797,33.96)
  Bottom Layer w0.6: P1.1 61.468,44.895 P5.1 61.468,35.738 64.948,32.258 v1(71.374,32.258) ; R3.1 78.969,35.611 82.093,38.735 ; v1(80.797,33.96) 80.797,35.743 82.093,37.038 82.093,38.735 ; U1.1 82.094,38.863 82.093,38.862 82.093,38.735
NetBT1_0: BT1.0 U5.16 | length 126.5
  Top Layer w0.6: v1(83.998,55.067) 83.816,55.067 83.435,55.448 65.268,55.448 64.222,54.403 64.222,45.324 66.802,42.745 66.802,31.394 69.737,28.459 112.572,28.459 118.225,34.112 128.321,34.112 v1(128.346,34.138)
  Bottom Layer w0.6: v1(83.998,55.067) 90.272,61.341 BT1.0 ; U5.16 126.935,35.549 v1(128.346,34.138)
NetC10_1: C10.1 U1.20 | length 3.4
  Bottom Layer w0.6: C10.1 101.981,50.8 102.414,50.367 U1.20
NetD1_2: D1.2 R3.2 | length 6.7
  Bottom Layer w0.6: R3.2 71.349,35.631 72.315,36.597 D1.2
NetD2_1: D2.1 R1.2 | length 7.8
  Bottom Layer w0.6: R1.2 112.658,30.666 120.083,30.666 D2.1
NetD4_1: D4.1 R16.2 | length 7.9
  Bottom Layer w0.6: D4.1 72.543,80.772 74.422,82.652 76.886,82.652 R16.2
NetD5_1: D5.1 R18.2 | length 9.2
  Top Layer w0.6: v1(94.158,30.328) 94.17,30.34 94.17,33.998 v1(94.183,34.011)
  Bottom Layer w0.6: R18.2 91.834,33.998 94.17,33.998 v1(94.183,34.011) ; v1(94.158,30.328) D5.1
ONOFF: P4.36 R17.1 S1.2 | length 64
  Top Layer w0.6: v1(116.383,89.789) 127.948,89.789 128.995,90.836 128.995,92.442 128.322,93.115 P4.36
  Bottom Layer w0.6: R17.1 81.915,71.12 82.931,71.12 S1.2 87.884,82.931 91.796,86.843 92.321,86.843 92.386,86.908 93.492,86.908 93.557,86.843 114.431,86.843 115.087,87.499 115.087,88.312 116.383,89.608 v1(116.383,89.789)
RESET: P4.38 P5.2 | length 102.4
  Top Layer w0.6: v1(66.573,45.974) 71.628,51.029 v1(73.304,51.029) ; v1(112.522,88.417) 112.547,88.392 127.965,88.392 130.862,91.288 P4.38
  Bottom Layer w0.6: P5.2 64.008,43.434 66.548,45.974 v1(66.573,45.974) ; v1(73.304,51.029) 73.304,64.084 79.315,70.095 79.315,76.165 91.567,88.417 v1(112.522,88.417)
RPI_INT1: P4.11 U1.12 | length 117.1
  Top Layer w0.6: v1(80.391,97.384) 80.391,97.455 82.038,99.101 96.86,99.101 97.816,98.145 97.816,96.175 P4.11
  Bottom Layer w0.6: v1(80.391,97.384) 80.391,82.194 75.54,77.343 75.54,68.478 71.78,64.719 71.78,51.282 70.206,49.708 70.206,47.498 72.752,44.951 101.789,44.951 102.801,43.939 107.434,43.939 U1.12
RPI_INT2: P4.13
SINC_A: J1.3 R5.1 U4.6 | length 42.8
  Top Layer w0.6: v1(130.683,15.519) 133.274,15.519 139.065,21.311 v1(139.065,26.01)
  Bottom Layer w0.6: U4.6 116.434,16.721 116.434,15.138 117.831,13.741 121.056,13.741 R5.1 127.762,15.519 v1(130.683,15.519) ; J1.3 137.274,27.686 138.951,26.01 v1(139.065,26.01)
SINC_B: J1.6 R2.1 U4.7 | length 47.7
  Bottom Layer w0.6: U4.7 114.866,25.502 R2.1 119.47,25.693 120.94,25.693 123.24,27.992 127.786,27.992 132.14,23.638 142.299,23.638 145.288,26.627 145.288,31.039 144.221,32.106 142.85,32.106 J1.6
SPI1_DSPIC_SS: P4.24 U1.4 | length 151.9
  Top Layer w0.6: v1(89.56,35.379) 89.566,35.385 116.212,35.385 116.942,36.115 116.942,49.394 115.697,50.638 115.697,58.191 102.032,71.857 78.156,71.857 75.562,74.45 75.562,77.111 80.62,82.169 93.929,82.169 98.628,86.868 105.579,86.868 108.718,90.006 110.438,90.006 110.491,89.953 112.211,89.953 113.082,90.823 P4.24
  Bottom Layer w0.6: v1(89.56,35.379) 89.637,35.456 89.637,41.262 U1.4
SPI1_MISO: P4.21 U1.17 | length 121.5
  Top Layer w0.6: v1(95.885,56.337) 97.651,58.103 108.496,58.103 111.1,55.499 v1(111.1,51.613) ; v1(110.515,98.4) 110.529,98.386 110.529,96.162 P4.21
  Bottom Layer w0.6: v1(95.885,56.337) 95.885,66.37 118.262,88.748 133.909,88.748 138.125,92.964 138.125,95.428 134.391,99.162 111.459,99.162 110.697,98.4 v1(110.515,98.4) ; U1.17 110.112,49.037 110.112,49.542 110.971,50.401 110.971,51.485 v1(111.1,51.613)
SPI1_MOSI: P4.19 U1.18 | length 109.3
  Top Layer w0.6: v1(107.95,98.374) 108.002,98.322 P4.19 ; v1(114.122,57.099) 114.135,57.087 114.135,54.024 v1(114.148,54.012)
  Bottom Layer w0.6: U1.18 107.494,49.17 109.322,50.998 109.322,52.764 110.569,54.012 v1(114.148,54.012) ; v1(107.95,98.374) 109.737,100.162 134.941,100.162 139.243,95.86 139.243,92.227 134.569,87.554 118.77,87.554 111.887,80.67 111.887,59.334 v1(114.122,57.099)
SPI1_SCK: P4.23 U1.16 | length 117.4
  Top Layer w0.6: P4.23 113.082,98.551 111.531,100.101 80.992,100.101 78.994,98.103 78.994,88.392 75.417,84.815 75.417,78.92 74.562,78.065 74.562,73.672 89.131,59.103 109.604,59.103 112.574,56.133 112.574,52.936 113.436,52.074 v1(113.436,51.892)
  Bottom Layer w0.6: U1.16 112.574,50.848 113.436,51.711 v1(113.436,51.892)
SPI1_SCR_CS: P4.26
SPI1_TOUCH_CS: P4.37
SPI2_DS3234_CS: U1.9 U5.1 | length 153.3
  Top Layer w0.6: v1(118.288,48.819) 118.333,48.864 118.333,53.998 v1(118.346,54.012)
  Bottom Layer w0.6: U1.9 100.801,42.951 80.62,42.951 77.064,39.395 77.064,33.985 78.464,32.585 95.78,32.585 96.571,33.376 103.322,33.376 103.357,33.41 122.651,33.41 124.677,31.385 132.334,31.385 137.595,36.646 142.752,36.646 143.395,37.288 143.395,49.772 139.192,53.975 118.383,53.975 v1(118.346,54.012) ; v1(118.288,48.819) 118.466,48.819 119.076,49.428 121.503,49.428 121.855,49.077 U5.1
SPI2_MISO: U1.5 U5.19 | length 37.8
  Bottom Layer w0.6: U1.5 U1.5 92.253,39.014 96.774,34.493 121.376,34.493 123.125,36.242 U5.19
SPI2_MOSI: U1.15 U5.17 | length 67.3
  Bottom Layer w0.6: U1.15 115.343,49.188 116.194,49.188 119.98,52.975 138.439,52.975 142.395,49.02 142.395,38.558 141.482,37.646 137.18,37.646 131.92,32.385 125.091,32.385 124.739,32.736 124.739,35.846 125.505,36.611 125.665,36.771 U5.17
SPI2_SCK: U1.14 U5.18 | length 11.2
  Bottom Layer w0.6: U1.14 122.426,41.339 124.395,39.37 U5.18
VCC: C4.1 C7.1 C8.1 C9.1 C12.1 C13.1 C15.1 D1.1 GPS1.1 GPS1.7 P1.2 R15.2 S1.1 U1.13 U1.28 U3.3 U4.2 U4.3 U5.4 | length 341.4
  Top Layer w0.6: GPS1.1 58.454,85.027 59.915,83.566 60.655,83.566 ; GPS1.7@58.411,69.894 59.48,69.894 62.087,72.501 62.087,82.134 60.655,83.566 ; GPS1.7@58.481,69.787 60.831,67.437 v1(60.858,67.437) ; v1(75.336,57.252) 65.71,66.878 65.71,86.614 64.902,87.422 63.119,87.422 v1(61.709,86.012) 61.581,85.883 61.581,84.491 60.655,83.566 ; v1(83.718,78.588) 89.383,78.588 v1(89.535,78.74) ; v1(89.535,27.026) 94.742,27.026 98.654,23.114 v1(100.736,23.114) ; v1(96.252,75.678) 96.316,75.742 102.338,75.742 102.414,75.818 108.814,75.818 108.814,78.333 106.35,80.797 v1(104.546,80.797) ; v1(126.42,50.557) 130.978,45.999 134.595,45.999 v1(136.572,47.976)
  Bottom Layer w0.6: v1(60.858,67.437) 60.858,64.795 59.766,63.703 59.766,47.786 60.118,47.435 P1.2@61.864,47.435 ; v1(61.709,86.012) 61.837,85.883 62.711,85.883 63.567,85.027 C13.1 ; P1.2 P1.2@61.864,47.435 ; D1.1 74.058,48.699 C4.1 ; v1(75.336,57.252) 75.208,57.123 75.208,47.829 C4.1 ; v1(83.718,78.588) 83.718,78.406 83.072,77.76 83.072,76.341 S1.1 80.315,73.584 80.315,50.738 U1.28 ; v1(89.535,27.026) 67.793,27.026 60.006,34.812 60.006,45.577 P1.2@61.864,47.435 ; v1(89.535,78.74) 89.554,78.759 92.896,78.759 C9.1 92.916,76.299 93.29,75.925 C15.1@93.29,73.715 ; C15.1 C15.1@93.29,73.715 ; v1(96.252,75.678) 96.188,75.614 95.46,75.614 93.561,73.715 C15.1@93.29,73.715 ; v1(100.736,23.114) 100.762,23.139 U4.2@104.564,23.139 ; v1(104.546,80.797) 104.675,80.926 104.675,81.775 C8.1 ; U4.3 104.572,20.643 104.572,23.147 U4.2 ; C7.1 U1.13 ; U5.4 125.665,49.896 126.325,50.557 v1(126.42,50.557) ; v1(136.572,47.976) 136.612,47.936 136.612,45.125 C12.1 ; R15.2 140.894,48.152 140.894,46.888 139.09,45.085 C12.1 ; C4.1 80.824,47.689 U1.28 ; U1.28 82.094,46.887 83.03,45.951 102.41,45.951 103.2,45.161 108.751,45.161 U1.13 ; U1.13 114.542,43.307 134.874,43.307 C12.1
pads on no net: BT1.2 BT1.3 BT1.4 GPS1. GPS1.5 GPS1.6 GPS1.8 J1.None P1.6 P4.1 P4.3 P4.5 P4.7 P4.8 P4.10 P4.12 P4.15 P4.16 P4.17 P4.18 P4.22 P4.27 P4.28 P4.32 P4.33 P4.35 U4.1 U5.3 U5.6 U5.20

## Silkscreen, mask and mechanical layers (free items; w line width, h text height)
Top Overlay:
  drawing of 8 lines, arcs and shapes, not listed
  text "R-012" at 78.167,92.394 h3 r90
  text "FUE+" at 139.395,88.189 h1.5
  text "Acelerografo V1.4" at 59.436,36.322 h3.7 r90
  text "Red Sismica del Austro" at 59.385,16.205 h1.4
  text "v24.2.27" at 90.78,16.205 h1.4
Mechanical 1:
  the board outline again, w0.1

## Dimensions
131.415,13.716 to 146.715,13.716 on Mechanical 1

## Text inside footprints (layer, text, board x,y; h text height)
D2: Top Overlay "+" at 117.297,30.175 h0.8
D4: Top Overlay "+" at 72.212,80.924 h0.8 r270
D5: Top Overlay "+" at 94.386,29.997 h0.8
GPS1: Bottom Overlay "Ultimate GPS / Breakout v3" at 85.99,69.787 h1.2 r270; Bottom Overlay "PA6H" at 70.242,72.581 h1.52 r180
U5: Mechanical 13 "*" at 122.413,46.711 h1.27 r90